# EAGLE board smartcar_shield_cutouts (EAGLE 9.4.0)
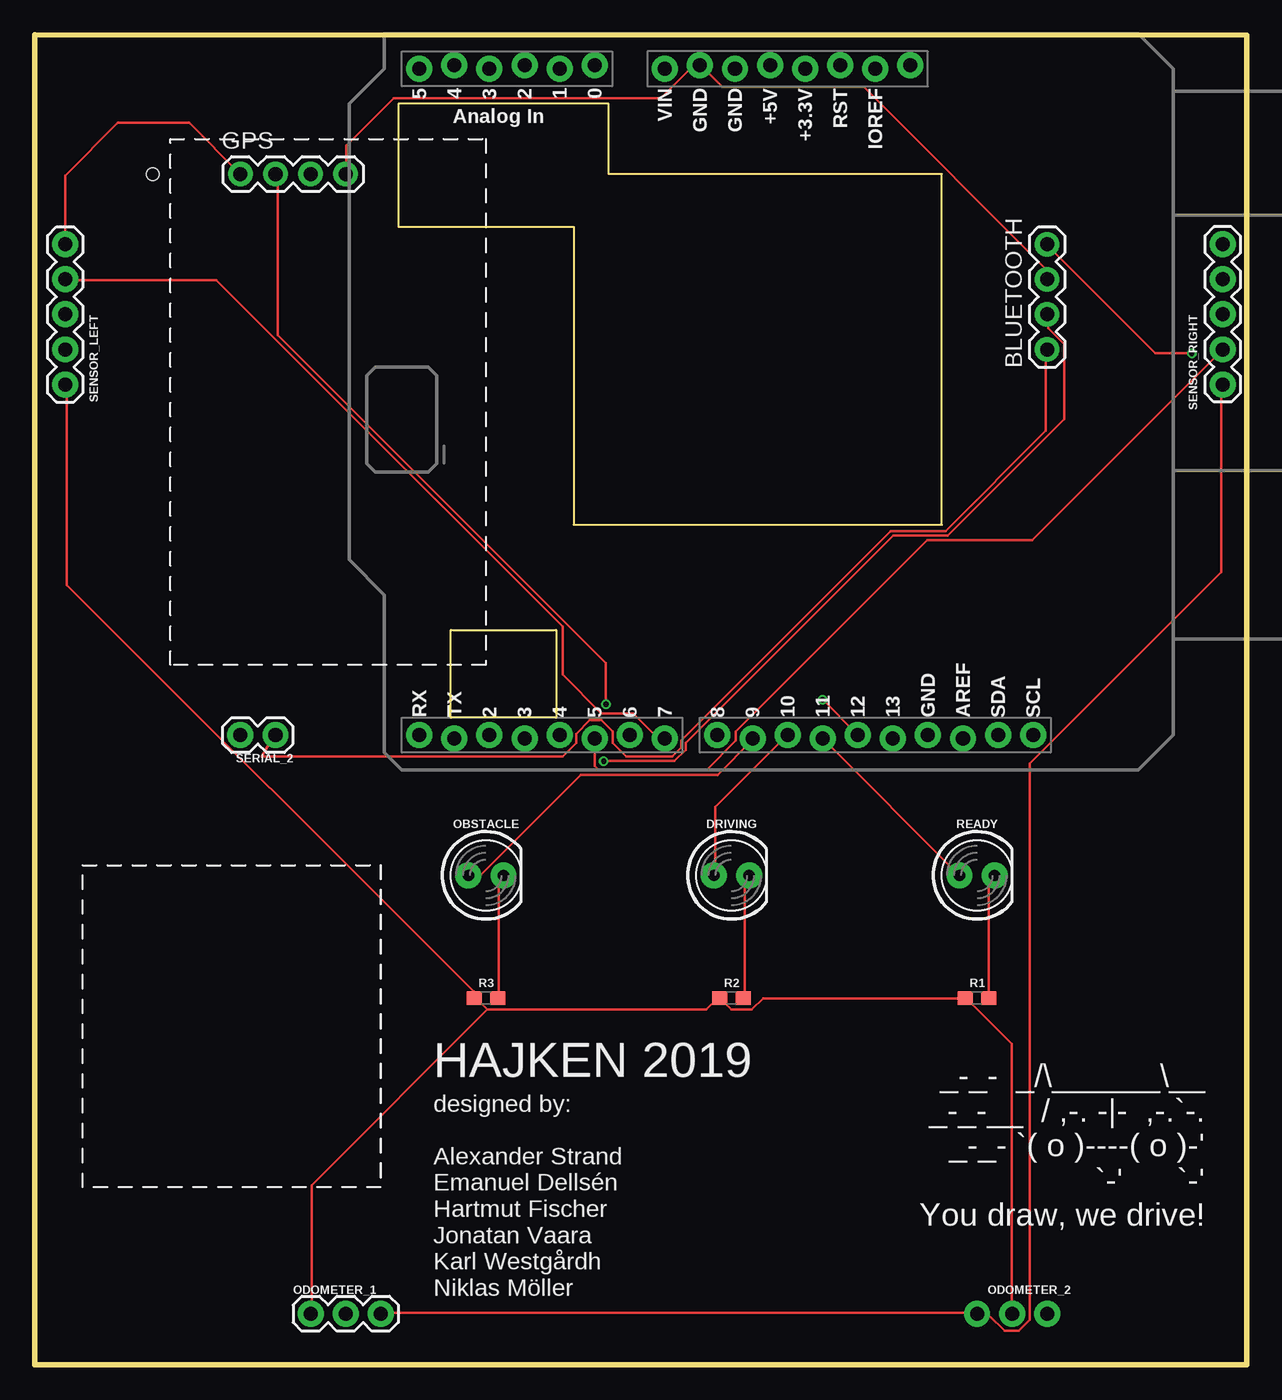
[diagram p0: board, top side]
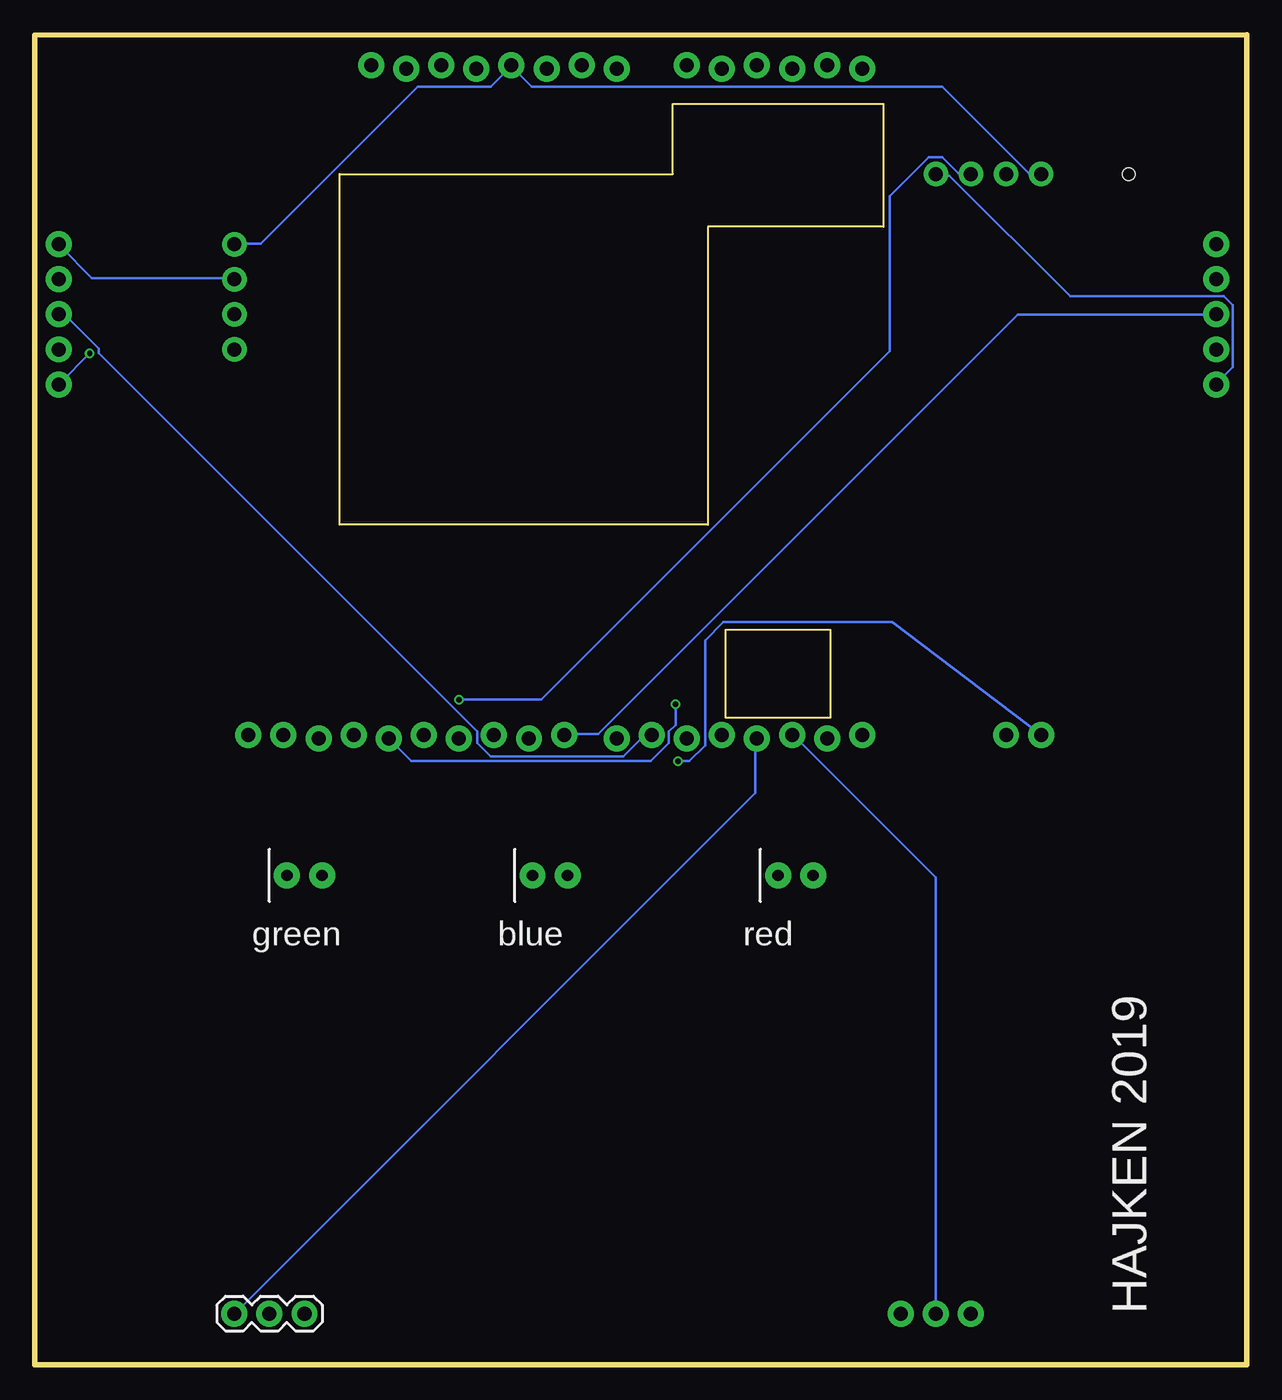
[diagram p1: board, bottom side, seen from below]

Size 87.8 x 96.38 mm. Coordinates in mm from the lower left corner, seen from the top.
Outline: 87.8,0 0,0 0,96.38 87.8,96.33 87.8,0
Outline: 65.71,60.87 65.71,86.27 41.58,86.27 41.58,91.35 26.34,91.35 26.34,82.46 39.04,82.46 39.04,60.87 65.71,60.87
Outline: 30.15,53.25 37.77,53.25 37.77,46.9 30.15,46.9 30.15,53.25
Copper layers (1*16): Top 0.035mm / dielectric 1.5mm / Bottom 0.035mm
Design rules "SeeedStudio_2layer_DRU_edited": minimum track width 7mil, minimum drill 15mil, track to track 6mil, track to pad 6mil, pad to pad 6mil, via to via 6mil, smd to smd 0mil, copper to edge 10mil, drill to drill 10mil, minimum pad ring 10mil, minimum via ring 6mil, stop-mask expansion 2mil, vias tented up to drill 100mil, thermal gap 10mil
Net classes: 0 default: width 0.152 mm, drill 0.305 mm, clearance 0.152 mm
Holes 0.9 mm at 8.56,86.27

## Footprints (pad centres in the part's own frame; a part is rotated, then mirrored left to right if it is on the bottom)
1X04-BIG = drill 1.016 pad 1.778: 1 0,0; 2 2.54,0; 3 5.08,0; 4 7.62,0
LED_5MM = drill 0.813 pad 1.88: A -1.27,0; K 1.27,0
UNO_R3_SHIELD_LOCK = drill 1.016 pad 1.88: 3.3V 50.8,26.67; 5V 51.054,29.21; A0 51.054,41.91; A1 50.8,44.45; A2 51.054,46.99; A3 50.8,49.53; A4 51.054,52.07; A5 50.8,54.61; AREF 2.286,15.24; D2 2.54,49.53; D3 2.286,46.99; D4 2.54,44.45; D5 2.286,41.91; D6 2.54,39.37; D7 2.286,36.83; D8 2.54,33.02; D9 2.286,30.48; D10 2.54,27.94; D11 2.286,25.4; D12 2.54,22.86; D13 2.286,20.32; GND@0 50.8,31.75; GND@1 51.054,34.29; GND@2 2.54,17.78; IOREF 50.8,21.59; NC 51.054,19.05; RES 51.054,24.13; RX 2.54,54.61; SCL 2.54,10.16; SDA 2.54,12.7; TX 2.286,52.07; VIN 50.8,36.83
1X03 = drill 1.016 pad 1.88: 1 0,0; 2 2.54,0; 3 5.08,0
0603 = smd 1.1 x 1: 1 -0.85,0; 2 0.85,0
1X05 = drill 1.016 pad 1.88: 1 0,0; 2 2.54,0; 3 5.08,0; 4 7.62,0; 5 10.16,0
1X02 = drill 1.016 pad 1.88: 1 0,0; 2 2.54,0

## Placement (x,y rotation side)
BLUETOOTH  [1X04-BIG]  73.33,73.57 90 top
DRIVING  blue  [LED_5MM]  50.47,35.47 0 top
GPS  [1X04-BIG]  14.91,86.27 0 top
J1  ARDUINO_R3_SHIELDUNO_R3_SHIELD_LOCK  [UNO_R3_SHIELD_LOCK]  82.47,43.09 90 top
OBSTACLE  red  [LED_5MM]  32.69,35.47 0 top
ODOMETER_1  Left  [1X03]  19.99,3.72 0 top
ODOMETER_2  Right  [1X03]  73.33,3.72 0 bottom
R1  220  [0603]  68.25,26.58 0 top
R2  220  [0603]  50.47,26.58 0 top
R3  220  [0603]  32.69,26.58 0 top
READY  green  [LED_5MM]  68.25,35.47 0 top
SENSOR_LEFT  [1X05]  2.21,71.03 90 top
SENSOR_RIGHT  [1X05]  86.03,81.19 270 top
SERIAL_2  [1X02]  17.45,45.63 180 top

## Library data of the parts
BLUETOOTH GPS = adafruit
DRIVING OBSTACLE READY = SparkFun-LED
J1 = SparkFun-Boards
ODOMETER_1 ODOMETER_2 = SparkFun-Connectors; PROD_ID: XXX-00000
R1-R3 = SparkFun-Resistors; PROD_ID: RES-07861
SENSOR_LEFT SENSOR_RIGHT SERIAL_2 = SparkFun-Connectors

## Nets
D2: J1.D2 ODOMETER_1.2
D3: J1.D3 ODOMETER_2.1
D5: J1.D5 SENSOR_RIGHT.4
D6: J1.D6 SENSOR_RIGHT.3
D7: J1.D7 SENSOR_LEFT.4
D8: J1.D8 SENSOR_LEFT.3
GND: BLUETOOTH.3 GPS.4 J1.GND@1 ODOMETER_1.1 ODOMETER_2.2 R1.1 R2.1 R3.1 SENSOR_LEFT.1 SENSOR_RIGHT.1
N$2: R1.2 READY.K
N$9: DRIVING.K R2.2
N$11: OBSTACLE.K R3.2
N$12: J1.D11 READY.A
N$13: DRIVING.A J1.D10
N$14: J1.D9 OBSTACLE.A
RX_B: GPS.2 J1.D13
RX_BLUE: BLUETOOTH.1 SERIAL_2.1
TX_B: GPS.3 J1.D12
TX_BLUE: BLUETOOTH.2 SERIAL_2.2
VCC: BLUETOOTH.4 GPS.1 J1.5V ODOMETER_1.3 ODOMETER_2.3 SENSOR_LEFT.5 SENSOR_RIGHT.5

## Tracks (layer width: path | path; a pad name or v marks a point on that pad's centre or on a via)
D2
  Bottom 0.178: ODOMETER_1.2 22.55,3.78 22.55,35.32 32.79,45.55 J1.D2
D3
  Bottom 0.178: J1.D3 35.6,45.22 35.6,41.43 73.24,3.78 ODOMETER_2.1
D5
  Top 0.178: J1.D5 40.55,45.22 40.55,43.41 40.88,43.08 48.64,43.08 50.79,45.22 50.79,45.88 64.66,59.75 72.25,59.75 85.95,73.46 SENSOR_RIGHT.4
D6
  Bottom 0.178: J1.D6 43.19,45.55 43.69,45.55 45.17,44.07 54.75,44.07 55.74,45.06 55.74,45.88 83.15,73.29 83.15,73.62 85.62,76.1 85.95,76.1 SENSOR_RIGHT.3
D7
  Top 0.178: J1.D7 45.5,45.39 45.17,45.39 43.36,47.2 41.05,47.2 38.24,50.01 38.24,53.48 13.14,78.57 2.35,78.57 SENSOR_LEFT.4
D8
  Bottom 0.178: J1.D8 49.3,45.72 46.99,45.72 16.61,76.1 2.35,76.1 SENSOR_LEFT.3
GND
  Top 0.178: 32.79,25.74 31.97,26.57 R3.1 31.8,26.73 31.8,27.06 2.35,56.51 2.35,70.98 SENSOR_LEFT.1 | 32.79,25.74 48.64,25.74 49.47,26.57 R2.1 49.63,26.57 50.46,25.74 51.94,25.74 52.77,26.57 67.3,26.57 R1.1 67.46,26.57 70.77,23.27 70.77,3.78 ODOMETER_2.2 | 32.79,25.74 20.08,13.03 20.08,3.78 ODOMETER_1.1 | GPS.4 22.55,86.33 22.55,88.31 26.02,91.78 45.34,91.78 47.65,94.09 48.15,94.09 J1.GND@1 48.31,94.09 49.8,92.61 60.03,92.61 73.24,79.4 73.24,78.74 BLUETOOTH.3
  Bottom 0.178: BLUETOOTH.3 73.41,78.74 83.64,78.74 85.95,81.05 SENSOR_RIGHT.1 | GPS.4 22.39,86.17 21.56,86.17 12.81,77.42 1.69,77.42 1.03,76.76 1.03,72.3 2.18,71.14 SENSOR_LEFT.1
N$2
  Top 0.178: R1.2 69.11,26.73 69.11,34.99 69.44,35.32 READY.K
N$9
  Top 0.178: R2.2 51.45,26.73 51.45,35.15 51.61,35.32 DRIVING.K
N$11
  Top 0.178: R3.2 33.62,26.73 33.62,34.99 33.95,35.32 OBSTACLE.K
N$12
  Top 0.178: J1.D11 READY.A
N$13
  Top 0.178: DRIVING.A 49.3,35.48 49.3,40.44 54.42,45.55 J1.D10
N$14
  Top 0.178: OBSTACLE.A 31.47,35.48 32.3,35.48 39.56,42.75 49.47,42.75 51.94,45.22 J1.D9
RX_B  (via drill 0.38)
  Top 0.178: v41.38,47.86 41.38,50.84 17.6,74.61 17.6,86.17 GPS.2
  Bottom 0.178: v41.38,47.86 41.38,46.38 41.87,45.88 41.87,45.06 43.19,43.74 60.53,43.74 62.01,45.22 J1.D13
RX_BLUE
  Top 0.178: BLUETOOTH.1 73.24,73.46 73.24,67.68 65.98,60.41 62.01,60.41 46.82,45.22 46.82,44.73 46.16,44.07 42.86,44.07 41.87,45.06 41.87,45.88 41.05,46.71 40.22,46.71 39.23,45.72 39.23,45.06 38.24,44.07 16.45,44.07 17.4,45.71 SERIAL_2.1
TX_B  (via drill 0.38)
  Top 0.178: v57.06,48.2 59.54,45.72 J1.D12
  Bottom 0.178: v57.06,48.2 51.12,48.2 25.86,73.46 25.86,84.68 23.05,87.49 22.06,87.49 20.9,86.33 20.08,86.33 GPS.3
TX_BLUE  (via drill 0.38)
  Top 0.178: v41.21,43.74 46.33,43.74 47.15,44.56 47.15,45.06 62.18,60.08 66.14,60.08 74.56,68.5 74.56,73.95 73.41,75.11 73.41,76.1 BLUETOOTH.2
  Bottom 0.178: v41.21,43.74 40.39,43.74 39.23,44.89 39.23,52.49 37.91,53.81 25.69,53.81 14.76,45.54 SERIAL_2.2
VCC  (via drill 0.38)
  Top 0.178: ODOMETER_1.3 25.2,3.78 68.12,3.78 ODOMETER_2.3 68.29,3.62 69.11,3.62 70.27,2.46 71.26,2.46 72.08,3.29 72.08,43.57 85.95,57.44 85.95,70.98 SENSOR_RIGHT.5 | GPS.1 11.2,89.98 6.03,89.98 2.21,86.16 SENSOR_LEFT.5 | v83.81,73.29 81.17,73.29 73.41,81.05 BLUETOOTH.4
  Bottom 0.178: 53.26,94.09 54.75,92.61 60.03,92.61 71.42,81.22 73.24,81.22 BLUETOOTH.4 | v83.81,73.29 85.95,71.14 SENSOR_RIGHT.5 | 53.26,94.09 51.78,92.61 22.06,92.61 15.79,86.33 14.96,86.33 GPS.1 | 53.26,94.09 J1.5V

## Text on the board
tNames: HAJKEN 2019 | _-_- _/\______\\__ / _-_-__ / ,-. -|- ,-.`-. / _-_- `( o )----( o )-' / `-' `-' / You draw, we drive! | designed by: / / Alexander Strand / Emanuel Dellsén / Hartmut Fischer / Jonatan Vaara / Karl Westgårdh / Niklas Möller
bNames: red | blue | green | HAJKEN 2019